# Altium PCB EtherIOv3.PcbDoc (part 1 of 2)
Units mil, origin at the board's own origin, x right, y up, seen from the top; angles counter-clockwise.
Board outline 4380 x 2505 mil, 2 copper layers (Top Layer, Bottom Layer); 104 components, 130 nets, 501 pads, 199 vias.
Unrouted connection lines stored in the file: 3.
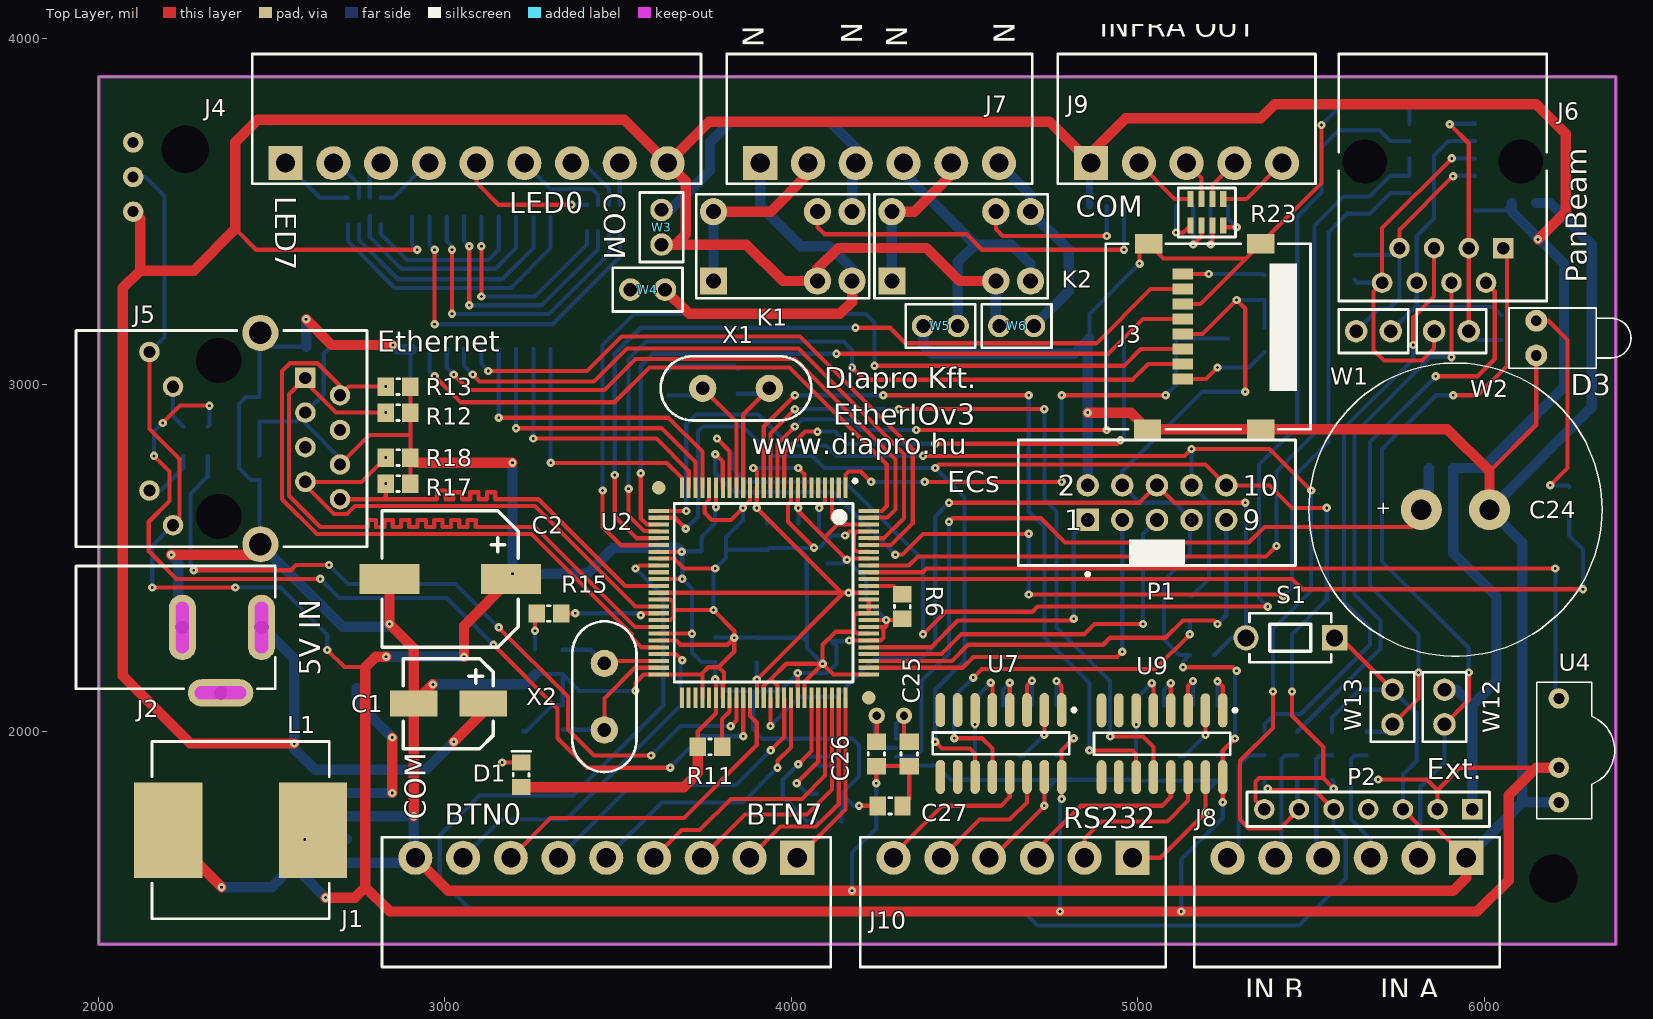
[diagram p0: Top Layer view]
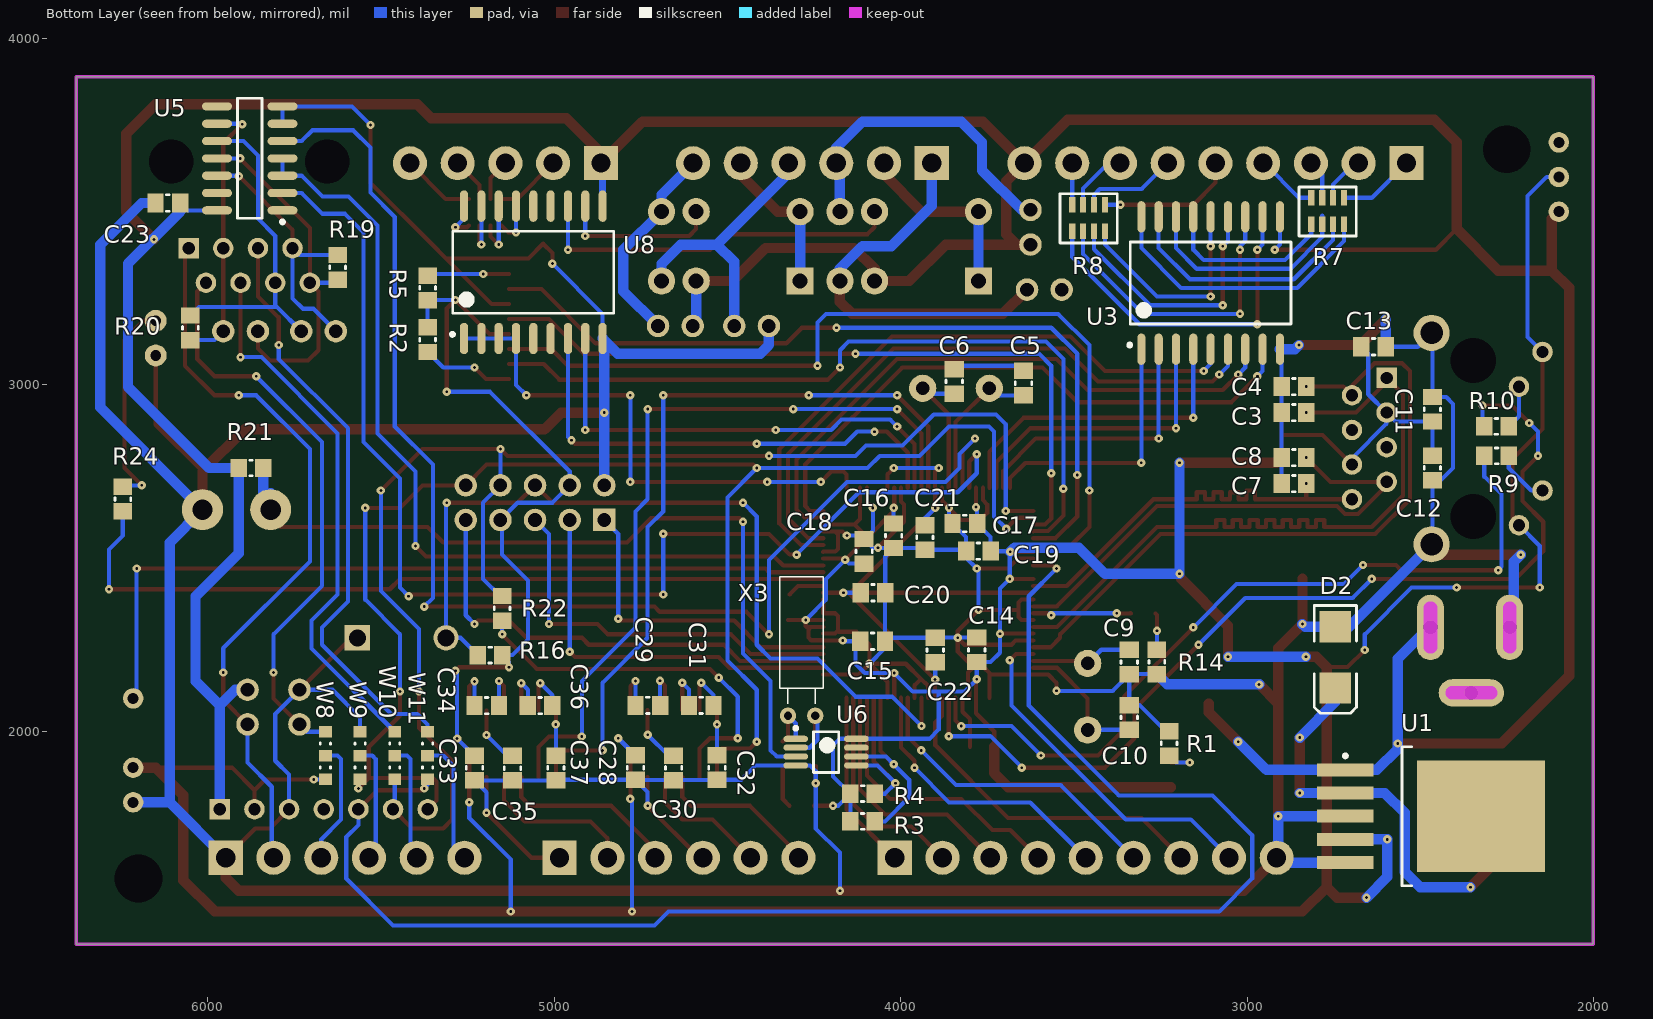
[diagram p1: Bottom Layer view, seen from below]

## Layer stack, top to bottom
Top Layer: signal copper 1.4
Dielectric: dielectric 12.6, FR-4, Dk 4.8
Bottom Layer: signal copper 1.4

## Board outline
2000,1385 6380,1385 6380,3890 2000,3890

## Design rules (kind name [scope] priority, off if disabled: settings)
Clearance [Not OnLayer('Keep-Out Layer') vs Not OnLayer('Keep-Out Layer')] p1: gap=7
HoleSize [All] p1: absolutevalues=TRUE maxlimit=140 minlimit=1 maxpercent=80.000 minpercent=20.000
MinimumSolderMaskSliver [All] p1: minsoldermaskwidth=1
PolygonConnect [All] p1: connectstyle=Relief reliefconductorwidth=10 reliefentries=4 polygonreliefangle="90 Angle"
RoutingVias [All] p1: holewidth=8 width=24 viastyle="Through Hole" minholewidth=8 minwidth=24 maxholewidth=8 maxwidth=24
SilkscreenOverComponentPads [All] p1: minsilkscreentomaskgap=0
SolderMaskExpansion [All] p1: expansion=4
Width Width_Power [(InNet('NetU1_5') OR InNet('NetU1_18'))] p1: maxlimit=50 minlimit=10 preferedwidth=25
Width [All] p2: maxlimit=30 minlimit=8 preferedwidth=12
25 further rules are at their usual default settings.

## Classes and differential pairs
component class EtherIOv3: C1 C2 C3 C4 C5 C6 C7 C8 C9 C10 C11 C12 C13 C14 C15 C16 C17 C18 C19 C20 C21 C22 D1 D2 D3 J1 J2 J3 J4 J5 L1 P1 R1 R2 R3 R4 R5 R6 R7 R8 R9 R10 R11 R12 R13 R14 R15 R16 R17 R18 R24 S1 U1 U2 U3 U4 X1 X2

## Components (designator, comment, footprint, x,y, rotation, side; value= is the part's Value field where it differs from the comment)
C1 "100uF_25V" "ELECTROLIT CAP F80" 3010,2080 r0 top
C2 "1000uF_6V3" "ELECTROLIT CAP J10" 3015,2440 r0 top
C3 "CAP" "0805 CAP" 2864.57,2920 r0 bottom
C4 "CAP" "0805 CAP" 2864.57,2995 r0 bottom
C5 "CAP" "0805 CAP" 3645,3005 r270 bottom
C6 "CAP" "0805 CAP" 3845,3010 r270 bottom
C7 "CAP" "0805 CAP" 2864.57,2715 r0 bottom
C8 "CAP" "0805 CAP" 2864.57,2790 r0 bottom
C9 "CAP" "0805 CAP" 3340,2200 r90 bottom
C10 "CAP" "0805 CAP" 3340,2040 r270 bottom
C11 "CAP" "0805 CAP" 2465,2929.57 r270 bottom
C12 "CAP" "0805 CAP" 2465,2760.43 r270 bottom
C13 "CAP" "0805 CAP" 2634.57,3110 r180 bottom
C14 "CAP" "0805 CAP" 3780,2235.43 r270 bottom
C15 "CAP" "0805 CAP" 4080.43,2260 r0 bottom
C16 "CAP" "0805 CAP" 4020,2564.57 r90 bottom
C17 "CAP" "0805 CAP" 3814.57,2600 r180 bottom
C18 "CAP" "0805 CAP" 4105,2519.57 r270 bottom
C19 "CAP" "0805 CAP" 3775.43,2520 r180 bottom
C20 "CAP" "0805 CAP" 4079.57,2400 r0 bottom
C21 "CAP" "0805 CAP" 3930,2559.57 r90 bottom
C22 "CAP" "0805 CAP" 3900,2234.57 r270 bottom
C23 "CAP" "0805 CAP" 6115,3525 r0 bottom
C24 "ELKO" Goldcap_1F 5916.57,2640 r180 top
C25 "CAP" "0805 CAP" 4340,1935 r90 top
C26 "CAP" "0805 CAP" 4245,1935 r90 top
C27 "CAP" "0805 CAP" 4285,1785 r0 top
C28 "CAP" "0805 CAP" 4765,1895.43 r270 bottom
C29 "CAP" "0805 CAP" 4729.57,2075 r0 bottom
C30 "CAP" "0805 CAP" 4655,1894.57 r270 bottom
C31 "CAP" "0805 CAP" 4575.43,2075 r180 bottom
C32 "CAP" "0805 CAP" 4530,1895.43 r270 bottom
C33 "CAP" "0805 CAP" 5230,1894.57 r270 bottom
C34 "CAP" "0805 CAP" 5194.57,2074.13 r0 bottom
C35 "CAP" "0805 CAP" 5120,1893.7 r270 bottom
C36 "CAP" "0805 CAP" 5040.43,2074.13 r180 bottom
C37 "CAP" "0805 CAP" 4995,1894.57 r270 bottom
D1 "PWR" "0805 LED" 3220,1874.57 r90 top
D2 "D Schottky" DSO-C2/X2.3 2745,2213.58 r270 bottom
D3 "STATUS" LED-1 6150,3135 r0 top
J1 "BUTTONS" "Euroblock 3.5pitch 9P" 4016.77,1634.96 r180 top
J2 "PWR2.5" KLD-0202 1935,2300 r0 top
J3 "MicroSD" microSD 5130,3016.69 r90 top
J4 "LEDS" "Euroblock 3.5pitch 9P" 2540,3640 r0 top
J5 "EthernetConnector" LU1T516-43 2025,2845 r90 top
J6 "RJ45-PanBeam" JACK1.27-2H8B 5880,3955 r180 top
J7 "Relays" "Euroblock 3.5pitch 6P" 3910,3640 r0 top
J8 "PB audio IN/Extension" "Euroblock 3.5pitch 6P" 5947.8,1635 r180 top
J9 "Infra OUT" "Euroblock 3.5pitch 5P" 4865,3640 r0 top
J10 "RS232" "Euroblock 3.5pitch 6P" 4983.98,1635 r180 top
K1 "REL0" RSY-12 3975,3300 r90 top
K2 "REL1" RSY-12 4490,3300 r90 top
L1 "100uH" INDP127127X85N 2410,1715 r0 top
P1 "Header 5X2" IDC2.54-V10D 5055,2660 r0 top
P2 "Extension" HDR1X7 5965,1775 r180 top
R1 "RES" "0805 RES" 3225,1965 r270 bottom
R2 "RES" "0805 RES" 5365,3130.43 r90 bottom
R3 "RES" "0805 RES" 4109.57,1740 r0 bottom
R4 "RES" "0805 RES" 4109.57,1820 r0 bottom
R5 "RES" "0805 RES" 5365,3280 r270 bottom
R6 "RES" "0805 RES" 4320,2360 r270 top
R7 "4x Res Array" "1206 4XRES ARRAY" 2720,3540 r0 bottom
R8 "4x Res Array" "1206 4XRES ARRAY" 3410,3520 r0 bottom
R9 "RES" "0805 RES" 2279.57,2795 r180 bottom
R10 "RES" "0805 RES" 2280,2880 r180 bottom
R11 "RES" "0805 RES" 3765,1955 r180 top
R12 "RES" "0805 RES" 2864.57,2920 r0 top
R13 "RES" "0805 RES" 2864.57,2995 r0 top
R14 "RES" "0805 RES" 3260,2200.43 r90 bottom
R15 "RES" "0805 RES" 3300,2340 r0 top
R16 "RES" "0805 RES" 5185,2220 r180 bottom
R17 "RES" "0805 RES" 2864.57,2715 r0 top
R18 "RES" "0805 RES" 2864.57,2790 r0 top
R19 "RES" "0805 RES" 5625,3339.33 r90 bottom
R20 "RES" "0805 RES" 6050,3164.76 r90 bottom
R21 "RES" "0805 RES" 5875,2760 r180 bottom
R22 "RES" "0805 RES" 5150,2355 r270 bottom
R23 "4x Res Array" "1206 4xRES ARRAY" 5246.5,3536.77 r180 top
R24 "RES" "0805 RES" 6245,2670.43 r270 bottom
S1 "SW-PB" SPST-2 5440,2270 r180 top
U1 "TS2576" TO-263-5L 2470,1755 r180 bottom
U2 "LM3S6911-IQC" QFP50P1600X1600X160-100N 3920,2400 r270 top
U3 "ULN2803A" SOIC127P1030X265-18N 3105,3294.06 r90 bottom
U4 "TSOP1736" TSOP17xx 6215,1945 r90 top
U5 "MAX491ESD" NSO14_N 5878.62,3653.82 r0 bottom
U6 "MCP79411" MSOP8 4215,1940 r180 bottom
U7 "MAX3232CSE" NSO16_M 4605,1965 r270 top
U8 "ULN2803A" SOIC127P1030X265-18N 5060,3325 r90 bottom
U9 "MAX3232CSE" NSO16_M 5070,1964.13 r270 top
W1 "Jumper" Jumper 5680,3154.76 r180 top
W2 "Jumper" Jumper 5905,3154.76 r180 top
W3 "Jumper" JUMPER 3625,3455 r270 top
W4 "Jumper" JUMPER 3585,3275 r180 top
W5 "Jumper" JUMPER 4430,3170 r180 top
W6 "Jumper" JUMPER 4650,3170 r180 top
W8 "A-/VCC3.3V" "0603 3WAY JUMPER" 5660,1964.45 r270 bottom
W9 "GND/AN0" "0603 3WAY JUMPER" 5560,1964.45 r270 bottom
W10 "B+/AN1" "0603 3WAY JUMPER" 5460,1964.45 r270 bottom
W11 "B-/GPIO4" "0603 3WAY JUMPER" 5365,1964.45 r270 bottom
W12 "Jumper" Jumper 5885,2070 r270 top
W13 "Jumper" Jumper 5735,2070 r270 top
X1 "CRYSTAL" CRYSTAL_LOW 3840,2990 r0 top
X2 "CRYSTAL" CRYSTAL_LOW 3460,2100 r270 top
X3 "CRYSTAL" CRYSTAL_MINI 4285.63,2045 r180 bottom

## Footprints (in the part's own frame and the unit in brackets; to place one, negate y for a bottom-side part, rotate by r counter-clockwise, add the part's x,y. Pads: shape width x height; smd on the part's side, far side on the other; paste and mask are expansions set on the pad)
"0603 3WAY JUMPER" [mm] "Chip Resistor, 2-Leads, Body 1,6x0,8mm, IPC Medium Density"
  rect 0.85x0.95 smd: 1(-0.875,0) 2(0.875,0) 3(2.625,0)
  silkscreen extent -0.05,-0.38 1.8,0.38, body extent -0.8,-0.45 2.5,0.45, height 0.55
"0805 CAP" [mm] "Chip Capacitor, 2-Leads, Body 2,0x1,3mm, IPC Medium Density"
  rect 1.2x1.4 smd: 1(-0.9,0) 2(0.9,0)
  silkscreen extent -0.1,-0.6 0.1,0.6, body extent -1.05,-0.67 1.05,0.67, height 1
"0805 LED" [mm] "SMD LED, 2-Leads, Body 2,0x1,3mm, IPC Medium Density"
  rect 1.2x1.35 smd: 1(-0.9,0) 2(0.9,0)
  silkscreen extent -0.1,-0.7 1.73,0.7, body extent -1.05,-0.67 1.05,0.67, height 1
"0805 RES" [mm] "Chip Resistor, 2-Leads, Body 2,0x1,3mm, IPC Medium Density"
  rect 1.2x1.35 smd: 1(-0.9,0) 2(0.9,0)
  silkscreen extent -0.1,-0.58 0.1,0.58, body extent -1.05,-0.67 1.05,0.67, height 1
"1206 4XRES ARRAY" [mm] "Chip Resistor, 2-Leads, Body 3,2x1,6mm, IPC Medium Density"
  rect 0.45x1.15 smd: 1(0,0) 2(0.8,0) 3(1.6,0) 4(2.4,0) 5(2.4,1.95) 6(1.6,1.95) 7(0.8,1.95) 8(0,1.95)
  silkscreen extent -0.9,-0.8 3.3,2.8, body extent -0.6,-0.3 3,2.3, height 0.6
"1206 4xRES ARRAY" [mm] "Chip Resistor, 2-Leads, Body 3,2x1,6mm, IPC Medium Density"
  rect 0.45x1.15 smd: 1(0,0) 2(0.8,0) 3(1.6,0) 4(2.4,0) 5(2.4,1.95) 6(1.6,1.95) 7(0.8,1.95) 8(0,1.95)
  silkscreen extent -0.9,-0.8 3.3,2.8, body extent -0.6,-0.3 3,2.3, height 0.6
CRYSTAL_LOW [mm]
  round 2 hole 1: 1(-2.44,0) 2(2.44,0)
  silkscreen extent -5.53,-2.35 5.53,2.35, body extent -5.6,-2.4 5.6,2.4, height 3.7
CRYSTAL_MINI [mm] "Furatszerelt D-3.1x8.2"
  round 1.2 hole 0.6: 1(-1,0) 2(1,0)
  silkscreen extent -1.6,0.89 1.6,10.2, body extent -1.5,2.1 1.49,10.1, height 3
DSO-C2/X2.3 [mm] "DO-214-AA/SMB; 2 C-Bend Leads; Body 5.3 x 3.6 mm, inc. leads (LxW)"
  rect 2.3x2.3 smd: 1(-2.25,0) 2(2.25,0)
  silkscreen extent -3.8,-1.55 4.1,1.55
"ELECTROLIT CAP F80" [mm]
  rect 3.5x1.9 smd: 1(-2.55,0) 2(2.55,0)
  silkscreen extent -3.3,-3.3 3.3,3.3, body extent -3.3,-3.3 3.3,3.3, height 7.6
"ELECTROLIT CAP J10" [mm]
  rect 4.4x2.2 smd: 1(-4.45,0) 2(4.45,0)
  silkscreen extent -5,-5 5,5, body extent -5,-5 5,5, height 10
"Euroblock 3.5pitch 5P" [mm] "3.5 mm pitch 5P connector"
  rect 2.5x2.5 hole 1.4: 1(0,0)
  round 2.5 hole 1.4 mask+0.102: 2(3.5,0) 3(7,0) 4(10.5,0) 5(14,0)
  silkscreen extent -2.45,-1.5 16.45,8, body extent -2.45,-1.5 16.45,8, height 7.2
"Euroblock 3.5pitch 6P" [mm] "3.5 mm pitch 6P connector"
  rect 2.5x2.5 hole 1.4: 1(0,0)
  round 2.5 hole 1.4 mask+0.102: 2(3.5,0) 3(7,0) 4(10.5,0) 5(14,0) 6(17.5,0)
  silkscreen extent -2.45,-1.5 19.95,8, body extent -2.45,-1.5 19.95,8, height 7.2
"Euroblock 3.5pitch 9P" [mm] "3.5 mm pitch 9P connector"
  rect 2.5x2.5 hole 1.4: 1(0,0)
  round 2.5 hole 1.4 mask+0.102: 2(3.5,0) 3(7,0) 4(10.5,0) 5(14,0) 6(17.5,0) 7(21,0) 8(24.5,0) 9(28,0)
  silkscreen extent -2.45,-1.5 30.45,8, body extent -2.45,-1.5 30.45,8, height 7.2
Goldcap_1F [mm] "Goldcap 1F 21.5x8mm"
  round 3 hole 1.5: 1(-2.5,0) 2(2.5,0)
  silkscreen extent -10.75,-10.75 10.75,10.75, body extent -10.72,-10.7 10.7,10.76, height 8
HDR1X7 [mm] "Connector; Header; 7 Position"
  rect 1.5x1.5 hole 0.9: 1(0,0)
  round 1.5 hole 0.9: 2(2.54,0) 3(5.08,0) 4(7.62,0) 5(10.16,0) 6(12.7,0) 7(15.24,0)
  silkscreen extent -1.27,-1.27 16.51,1.27
IDC2.54-V10D [mm] "Connector; IDC, Low Profile Male Header, Thru-Hole; 10 Position; Vertical; Pitch 2.54 mm; Body 20.32 x 9.2 x 9.45 mm (LxWxH)"
  rect 1.65x1.65 hole 1: 1(-5.08,-1.27)
  round 1.65 hole 1: 2(-5.08,1.27) 3(-2.54,-1.27) 4(-2.54,1.27) 5(0,-1.27) 6(0,1.27) 7(2.54,-1.27) 8(2.54,1.27) 9(5.08,-1.27) 10(5.08,1.27)
  silkscreen extent -10.16,-5.37 10.16,4.6, body extent -10.16,-4.6 10.16,4.6, height 9.45
INDP127127X85N [mm] "Precision Wire Wound Inductor, 2-Leads, Body 12,7x12,7mm, IPC Medium Density"
  rect 5x7 smd: 1(-5.3,0) 2(5.3,0)
  silkscreen extent -6.5,-6.5 6.5,6.5, body extent -6.5,-6.5 6.5,6.5, height 8.5
JACK1.27-2H8B [mm] "Connector; PCB Jack, Thru-Hole; 1-Port, 8 Positions, 8 Loaded; Unshielded without Lightpipes; Right Angle"
  rect 1.5x1.5 hole 0.9: 1(-4.445,14.23)
  round 1.5 hole 0.9: 2(-3.175,16.77) 3(-1.905,14.23) 4(-0.635,16.77) 5(0.635,14.23) 6(1.905,16.77) 7(3.175,14.23) 8(4.445,16.77)
  round 2.95 hole 3.25 unplated: MH1(-5.715,7.88) MH2(5.715,7.88)
  silkscreen extent -7.62,0 7.62,18.1, body extent -7.62,0 7.62,18.1, height 8.65
Jumper [mm] "Jumper, 2.54 pitch"
  round 1.65 hole 1: 1(-1.27,0) 2(1.27,0)
  silkscreen extent -2.55,-1.6 2.55,1.6, body extent -2.54,-1.6 2.54,1.6, height 8.54
JUMPER [mm] "Jumper, 2.54 pitch"
  round 1.65 hole 1: 1(-1.27,0) 2(1.27,0)
  silkscreen extent -2.55,-1.6 2.55,1.6, body extent -2.54,-1.6 2.54,1.6, height 8.54
KLD-0202 [mm] "DC Power Jack, 2.5mm, KLD Series, PCB Mount"
  oval 2x4.8 hole 1: 1(13.6,0) 2(7.8,0)
  oval 4.8x2 hole 1: 3(10.6,-4.8)
  Keep-Out Layer lines w1: 7.8,-1.4 7.8,1.4 ; 9.2,-4.8 12,-4.8 ; 13.6,-1.4 13.6,1.4
  silkscreen extent 0,-4.5 14.6,4.5, body extent 0,-4.5 14.6,4.5, height 10.7
LED-1 [mm] "Typical RED GaAs LED; 2 Leads"
  round 1.6 hole 0.8: 1(0,1.27) 2(0,-1.27)
  silkscreen extent -2,-2.2 6.95,2.2
LU1T516-43 [mm] "Connector; PCB Jack, Thru-Hole; 1-Port, 8 Positions, 8 Loaded; Shielded without Lightpipes; Right Angle"
  round 2.65 hole 1.651: MH1(7.747,-11.227) MH2(-7.747,-11.227)
  round 2.95 hole 3.302 unplated: MH3(5.715,-8.179) MH4(-5.715,-8.179)
  rect 1.5x1.5 hole 0.9: P1(4.445,-14.529)
  round 1.5 hole 0.9: P2(3.175,-17.069) P3(1.905,-14.529) P4(0.635,-17.069) P5(-0.635,-14.529) P6(-1.905,-17.069) P7(-3.175,-14.529) P8(-4.445,-17.069) P9(6.35,-3.099) P10(3.81,-4.826) P11(-3.81,-3.099) P12(-6.35,-4.826)
  silkscreen extent -7.92,-19.05 7.92,2.29, body extent -7.87,-19.05 7.87,2.29, height 12.09
microSD [mm]
  rect 0.8x1.5 smd: 1(0,0) 2(1.1,0) 3(2.2,0) 4(3.3,0) 5(4.4,0) 6(5.5,0) 7(6.6,0) 8(7.7,0)
  rect 1.45x2 smd: 9(-3.675,2.6) 10(9.925,2.5) 11(-3.675,-5.7) 12(9.925,-5.7)
  Top Overlay keep-out region: -0.888,-8.349 8.462,-8.349 8.462,-6.349 -0.888,-6.349
  silkscreen extent -3.67,-9.35 9.92,5.65
MSOP8 [mm] "MSOP, 8-Leads, Body 3,0x3,0mm (max), Pitch 0,65mm, IPC Medium Density"
  oval 1.8x0.45 smd: 1(-2.225,0.975) 2(-2.225,0.325) 3(-2.225,-0.325) 4(-2.225,-0.975) 5(2.225,-0.975) 6(2.225,-0.325) 7(2.225,0.325) 8(2.225,0.975)
  silkscreen extent -2.35,-1.5 0.92,1.87, body extent -1.52,-1.53 1.53,1.52, height 1.1
NSO14_N [mm] "SOIC, 14-Leads, Body 8.7x3.9mm, Pitch 1.27mm, IPC Medium Density"
  oval 2.2x0.6 smd: 1(-2.4,3.81) 2(-2.4,2.54) 3(-2.4,1.27) 4(-2.4,0) 5(-2.4,-1.27) 6(-2.4,-2.54) 7(-2.4,-3.81) 8(2.4,-3.81) 9(2.4,-2.54) 10(2.4,-1.27) 11(2.4,0) 12(2.4,1.27) 13(2.4,2.54) 14(2.4,3.81)
  silkscreen extent -2.52,-4.4 0.9,4.78, body extent -2,-4.38 2,4.38, height 1.75
NSO16_M [mm] "SOIC, 16-Leads, Body 9.9x3.9mm, Pitch 1.27mm, IPC Low Density"
  oval 2.5x0.7 smd: 1(-2.45,4.445) 2(-2.45,3.175) 3(-2.45,1.905) 4(-2.45,0.635) 5(-2.45,-0.635) 6(-2.45,-1.905) 7(-2.45,-3.175) 8(-2.45,-4.445) 9(2.45,-4.445) 10(2.45,-3.175) 11(2.45,-1.905) 12(2.45,-0.635) 13(2.45,0.635) 14(2.45,1.905) 15(2.45,3.175) 16(2.45,4.445)
  silkscreen extent -2.57,-5 0.8,5.47, body extent -2,-5 2,5, height 1.75
QFP50P1600X1600X160-100N [mm] "QFP,0.50mm pitch,square;25 pin X 25 pin,14.00mm X 14.00mm X 1.60mm H body"
  rect 1.5x0.3 smd: 1(-7.7,6) 2(-7.7,5.5) 3(-7.7,5) 4(-7.7,4.5) 5(-7.7,4) 6(-7.7,3.5) 7(-7.7,3) 8(-7.7,2.5) 9(-7.7,2) 10(-7.7,1.5) 11(-7.7,1) 12(-7.7,0.5) 13(-7.7,0) 14(-7.7,-0.5) 15(-7.7,-1) 16(-7.7,-1.5) 17(-7.7,-2) 18(-7.7,-2.5) 19(-7.7,-3) 20(-7.7,-3.5) 21(-7.7,-4) 22(-7.7,-4.5) 23(-7.7,-5) 24(-7.7,-5.5) 25(-7.7,-6) 51(7.7,-6) 52(7.7,-5.5) 53(7.7,-5) 54(7.7,-4.5) 55(7.7,-4) 56(7.7,-3.5) 57(7.7,-3) 58(7.7,-2.5) 59(7.7,-2) 60(7.7,-1.5) 61(7.7,-1) 62(7.7,-0.5) 63(7.7,0) 64(7.7,0.5) 65(7.7,1) 66(7.7,1.5) 67(7.7,2) 68(7.7,2.5) 69(7.7,3) 70(7.7,3.5) 71(7.7,4) 72(7.7,4.5) 73(7.7,5) 74(7.7,5.5) 75(7.7,6)
  rect 0.3x1.5 smd: 26(-6,-7.7) 27(-5.5,-7.7) 28(-5,-7.7) 29(-4.5,-7.7) 30(-4,-7.7) 31(-3.5,-7.7) 32(-3,-7.7) 33(-2.5,-7.7) 34(-2,-7.7) 35(-1.5,-7.7) 36(-1,-7.7) 37(-0.5,-7.7) 38(0,-7.7) 39(0.5,-7.7) 40(1,-7.7) 41(1.5,-7.7) 42(2,-7.7) 43(2.5,-7.7) 44(3,-7.7) 45(3.5,-7.7) 46(4,-7.7) 47(4.5,-7.7) 48(5,-7.7) 49(5.5,-7.7) 50(6,-7.7) 76(6,7.7) 77(5.5,7.7) 78(5,7.7) 79(4.5,7.7) 80(4,7.7) 81(3.5,7.7) 82(3,7.7) 83(2.5,7.7) 84(2,7.7) 85(1.5,7.7) 86(1,7.7) 87(0.5,7.7) 88(0,7.7) 89(-0.5,7.7) 90(-1,7.7) 91(-1.5,7.7) 92(-2,7.7) 93(-2.5,7.7) 94(-3,7.7) 95(-3.5,7.7) 96(-4,7.7) 97(-4.5,7.7) 98(-5,7.7) 99(-5.5,7.7) 100(-6,7.7)
  round 1 smd: 101(-7.7,-7.7) 102(7.7,7.7)
  Top Layer pour cut-out: 154 vertices and 0 holes, not listed, extent 6.7,6.7 8.7,8.7
  Top Layer pour cut-out: 154 vertices and 0 holes, not listed, extent -8.7,-8.7 -6.7,-6.7
  silkscreen extent -8.32,-6.55 6.55,6.83
RSY-12 [mm]
  round 2 hole 1.1: COIL1(0,-2.54) COIL2(5.08,-2.54) COM2(5.08,5.08) NC(0,-5.08) NO(5.08,-5.08)
  rect 2x2 hole 1.1: COM1(0,5.08)
  silkscreen extent -1.27,-6.35 6.35,6.35, body extent -1.27,-6.35 6.35,6.35, height 10.2
SOIC127P1030X265-18N [mm] "SOIC, 18-Leads, Body 11,8x7,6mm (max), Pitch 1,27mm, IPC Medium Density"
  oval 2.3x0.6 smd: 1(-4.85,5.08) 2(-4.85,3.81) 3(-4.85,2.54) 4(-4.85,1.27) 5(-4.85,0) 6(-4.85,-1.27) 7(-4.85,-2.54) 8(-4.85,-3.81) 9(-4.85,-5.08) 10(4.85,-5.08) 11(4.85,-3.81) 12(4.85,-2.54) 13(4.85,-1.27) 14(4.85,0) 15(4.85,1.27) 16(4.85,2.54) 17(4.85,3.81) 18(4.85,5.08)
  silkscreen extent -4.67,-5.9 3,6.06, body extent -3.8,-5.87 3.8,5.87, height 2.65
SPST-2 [mm] "Circuit Breaker; 2 Leads"
  rect 1.85x1.85 hole 1.25: 1(-3.25,0)
  round 1.85 hole 1.25: 2(3.25,0)
  silkscreen extent -3,-1.8 3,1.8
TO-263-5L [mm] "D2-PAK, 6-Pads, Body 8,3x10,2mm (max), IPC Medium Density"
  rect 4.15x0.95 smd: 1(-6.25,3.4) 2(-6.25,1.7) 3(-6.25,0) 4(-6.25,-1.7) 5(-6.25,-3.4)
  rect 9.4x8.2 smd: 6(3.7,0)
  silkscreen extent -6.38,-5.1 -1.4,5.1, body extent -2.1,-5.1 6.18,5.1, height 4.57
TSOP17xx [mm] "TSOP17xx IR Receiver"
  round 1.5 hole 0.8: 1(-3.81,0) 2(-1.27,0) 3(3.81,0)
  silkscreen extent -5,-4.09 5,1.6, body extent -5,-4.1 5,1.6, height 13.3

## Part data
C1 C2: "SMD Electrolit Capacitor"
C3 C4 C5 C6 C7 C8 C9 C10 C11 C12 C13 C14 C15 C16 C17 C18 C19 C20 C21 C22 C23 C25 C26 C27 C28 C29 C30 C31 C32 C33 C34 C35 C36 C37: "Capacitor"
C24: "Electrolit Capacitor"
D1: library part LED2, "Typical RED, GREEN, YELLOW, AMBER GaAs LED"
D2: "Schottky Diode"
D3: library part LED1, "Typical RED GaAs LED"
J1 J4: library part "Euroblock 9P connector"
J2: "Low Voltage Power Supply Connector"
J6: "PanBeam - RS485 + 2xAudio"
J7 J8 J10: library part "Euroblock 6P connector"
J9: library part "Euroblock 5P connector"
K1 K2: library part Relay, "SPDT Relay"
L1: library part Inductor, "Inductor"
P1: "Header, 5-Pin, Dual row"
P2: library part "Header 7", "Header, 7-Pin"
R1 R2 R3 R4 R5 R6 R9 R10 R11 R12 R13 R14 R15 R16 R17 R18 R19 R20 R21 R22 R24: "Resistor"
R7 R8 R23: "Isolated Resistor Network"
S1: "Switch"
U1: "Step Down DC-DC Converter"
U2: library part LM3S6611-IQC, "Stellaris ARM Cortex-M3 Microcontroller"
U3 U8: "8xDarlington Driver"
U4: library part TSOP17xx, "IR Receiver, 3-Pin"
U5: "Low-Power, Slew-Rate-Limited RS-485/RS-422 Transceiver"
U6: "MCP79411 I2C RTCC + MAC"
U7 U9: "3.0V TO 5.5V, Low-Power, up to 1Mbps, True RS-232 Transceiver Using Four 0.1µF External Capacitor"
W1 W2 W3 W4 W5 W6 W12 W13: "Jumper Wire"
W8 W9 W10 W11: library part Jumper_3way, "Jumper Wire"
X1 X2 X3: "Crystal"

## Free pads (board coordinates)
  round 59.06 hole 31.5: 0(2100,3700) 1(2100,3600) 2(2100,3500)
  round 60 hole 137.8: 0(2250,3680) 0(6200,1575)

## Via types
v1: diameter 24, hole 8, Top Layer to Bottom Layer, 199 vias

## Nets (pads, with @x,y where several pads share a name; then routed paths per layer and width w, separated by ;. In a path a pad name is that pad's centre, name@x,y a point inside that pad or via, vN(x,y) a via of type N, cw(c..) or ccw(c..) an arc to the next point about the centre after c; other vN are vias at no path point)
A+: J6.1 J8.2 W12.2 | length 2146.9
  Top Layer w12: W12.2@5885,2020 5955,2090 v1(5955,2170) ; v1(5910,2970) 5980,2970 6065,3055 6065,3384.76 J6.1@6055,3394.76
  Bottom Layer w12: J8.2@5810,1635 5815,1640 5815,1840 5885,1910 W12.2@5885,2020 ; v1(5910,2970) 5860,2970 5705,2815 5705,2490 5955,2240 v1(5955,2170)
A-: J6.2 W8.1 W13.2 | length 1677.3
  Top Layer w12: W13.2@5735,2020 5810,2095 v1(5810,2170) ; v1(5860,3025) 5980,3025 6030,3075 6030,3269.76 J6.2@6005,3294.76
  Bottom Layer w12: W8.1@5660,1998.9 5713.9,1998.9 W13.2@5735,2020 ; v1(5810,2170) 5810,2280 5670,2420 5670,2835 v1(5860,3025)
A-/VCC3.3V: J8.3 W8.2 | length 357.8
  Bottom Layer w12: W8.2@5660,1930 5625,1930 5615,1920 5615,1745 5672.2,1687.8 J8.3@5672.2,1635
AN2: P2.4
B+: J6.4 W10.1 | length 1577.5
  Top Layer w12: v1(5905,3080) J6.4@5905,3294.76
  Bottom Layer w12: W10.1@5460,1998.9 5700,2238.9 5700,2320 5625,2395 5625,2860 5845,3080 v1(5905,3080)
B+/U0RX: J8.5 W10.2 | length 341.8
  Bottom Layer w12: J8.5@5396.61,1635 5415,1653.39 5415,1920 5425,1930 W10.2@5460,1930
B-: J6.5 W11.1 | length 1704.9
  Top Layer w12: v1(5795,3115) 5795,3195 5855,3255 J6.5@5855,3394.76
  Bottom Layer w12: W11.1@5365,1998.9 5365,2020 5395,2050 5470,2050 5670,2250 5670,2300 5595,2375 5595,2875 5795,3075 v1(5795,3115)
B-/GPIO4: J8.6 W11.2 | length 365.3
  Bottom Layer w12: J8.6@5258.82,1635 5290,1666.18 5290,1900 5320,1930 W11.2@5365,1930
BTN0: J1.8 U2.47 | length 1017.7
  Top Layer w12: U2.47@3616.85,2222.83 3667.17,2222.83 v1(3685,2205)
  Bottom Layer w12: J1.8@3052.2,1634.96 3162.24,1745 3350,1745 3680,2075 3680,2200 v1(3685,2205)
BTN1: J1.7 U2.61 | length 989.5
  Top Layer w12: J1.7@3190,1634.96 3305.04,1750 3690,1750 3900,1960 3900,2025 3880.63,2044.37 U2.61@3880.63,2096.85
BTN2: J1.6 U2.66 | length 908.7
  Top Layer w12: v1(3940,1945) 3979.06,1984.06 U2.66@3979.06,2096.85
  Bottom Layer w12: J1.6@3327.8,1634.96 3537.83,1845 3840,1845 v1(3940,1945)
BTN3: J1.5 U2.67 | length 820
  Top Layer w12: v1(3960,1895) 3960,1915 3998.74,1953.74 U2.67@3998.74,2096.85
  Bottom Layer w12: J1.5@3465.59,1634.96 3625.63,1795 3860,1795 v1(3960,1895)
BTN4: J1.4 U2.72 | length 816.7
  Top Layer w12: J1.4@3603.39,1634.96 3683.42,1715 3735,1715 3825,1805 4030,1805 4097.17,1872.17 U2.72@4097.17,2096.85
BTN5: J1.3 U2.73 | length 722.2
  Top Layer w12: J1.3@3741.18,1634.96 3866.22,1760 4045,1760 4116.85,1831.85 U2.73@4116.85,2096.85
BTN6: J1.2 U2.74 | length 628.2
  Top Layer w12: J1.2@3878.98,1634.96 3969.02,1725 4070.87,1725 4136.54,1790.67 U2.74@4136.54,2096.85
BTN7: J1.1 U2.75 | length 519.7
  Top Layer w12: J1.1@4016.77,1634.96 4156.22,1774.41 U2.75@4156.22,2096.85
GND: C1.1 C2.1 C3.2 C4.2 C5.1 C6.1 C7.2 C8.2 C9.1 C10.1 C11.1 C12.2 C13.2 C14.1 C15.1 C16.1 C17.1 C18.1 C19.1 C20.1 C21.1 C22.1 C23.2 C24.1 C25.1 C26.1 C27.2 C28.2 C30.2 C32.2 C33.2 C35.2 C37.2 D2.1 D3.2 J1.9 J2.2 J3.6 J3.9 J3.10 J3.11 J3.12 J5.MH1 J5.MH2 J8.1 J10.1 J10.4 P1.2 P2.3 pad.0@2100,3700 R1.1 R14.1 S1.1 U1.3 U1.5 U2.4 U2.9 U2.15 U2.21 U2.33 U2.39 U2.42 U2.45 U2.50 U2.54 U2.57 U2.63 U2.65 U2.69 U2.76 U2.82 U2.85 U2.86 U2.87 U2.94 U2.97 U3.9 U4.1 U5.6 U5.7 U6.4 U7.15 U8.9 U9.15 W4.2 W5.2 W9.1 W13.1 | length 22899.8
  Top Layer w12: v1(3550,2116.85) 3550,2140 3573.78,2163.78 U2.50@3616.85,2163.78 3738.78,2163.78 3742.83,2167.83 ; U2.45@3616.85,2262.2 3667.8,2262.2 3680,2250 3815,2250 v1(3835,2270) ; U2.42@3616.85,2321.26 3650.98,2321.26 3659.38,2329.65 3659.38,2350 ; U2.39@3616.85,2380.32 3650.98,2380.32 3659.38,2371.92 3659.38,2350 ; U2.33@3616.85,2498.43 3661.57,2498.43 3690,2470 v1(3780,2470) ; U2.54@3742.83,2096.85 3742.83,2167.83 ; U2.21@3762.52,2703.15 3762.52,2667.52 3750,2655 3750,2630 3770,2610 3825,2610 v1(3860,2645) 3880.63,2665.63 U2.15@3880.63,2703.15 ; U2.57@3801.89,2096.85 3801.89,2136.53 3805,2139.64 3805,2170 3790,2185 ; U2.63@3920,2096.85 3920,2130.98 3928.39,2139.38 3929.38,2139.38 3941.12,2151.12 ; U2.65@3959.37,2096.85 3959.37,2132.86 3941.12,2151.12 ; U2.9@3998.74,2703.15 3998.74,2663.74 3990,2655 3990,2605 v1(4065,2530) ; U2.69@4038.11,2096.85 4038.11,2143.11 v1(4090,2195) ; v1(4080,2645) 4097.17,2662.17 U2.4@4097.17,2703.15 ; v1(4155,2565) 4167.17,2577.17 4189.02,2577.17 ; 4177.56,2287.2 4127.2,2287.2 4090,2250 v1(4090,2195) ; U2.76@4223.15,2163.78 4121.22,2163.78 v1(4090,2195) ; U2.82@4223.15,2281.89 4189.02,2281.89 4180.62,2290.28 4180.62,2332.55 4189.02,2340.94 U2.85@4223.15,2340.94 U2.86@4223.15,2360.63 U2.87@4223.15,2380.32 ; U2.94@4223.15,2518.11 4222.46,2518.8 4188.33,2518.8 4180.62,2526.51 4180.62,2568.77 4189.02,2577.17 ; U2.97@4223.15,2577.17 4189.02,2577.17 ; v1(4245,1850) C26.1@4245,1899.57 C25.1@4340,1899.57 4340,1804.57 C27.2@4320.43,1785 ; J10.4@4570.59,1635 4580,1635 v1(4730,1785) U7.15@4730,1868.54 ; J10.1@4983.98,1635 5065,1635 v1(5195,1765) U9.15@5195,1867.68 ; v1(5005,3350) 5005,3380.87 J3.10@5031.57,3407.44 5074.02,3365 5311.97,3365 ; J3.6@5130,3233.23 5180.2,3233.23 5311.97,3365 ; v1(5530,3750) 5530,3583.03 J3.12@5354.41,3407.44 5311.97,3365 ; S1.1@5567.95,2270 5585,2270 W13.1@5735,2120 ; P2.3@5765,1775 5820,1720 5862.8,1720 J8.1@5947.8,1635 ; 6015,2750 6150,2885 D3.2@6150,3085 ; 3659.38,2350 v1(3775,2350) 3835,2290 v1(3835,2270) ; 3742.83,2167.83 3760,2185 3790,2185 ; 3790,2185 3835,2230 v1(3835,2270) ; 3941.12,2151.12 3985,2195 v1(4090,2195)
  Top Layer w30: v1(2210,2510) 2437,2510 J5.MH2@2467,2540 J5.MH2@2467,2536.72 ; v1(2599.13,3189.13) 2673.27,3115 v1(2850,3115) ; C2.1@2839.8,2440 2839.8,2309.8 v1(2840,2309.61) 2909.61,2240 C1.1@2909.61,2080 ; v1(2910,1755) 2909.61,1755.39 C1.1@2909.61,2080 ; J1.9@2914.41,1634.96 3009.37,1540 v1(4175,1540) 5910,1540 5947.8,1577.8 J8.1@5947.8,1635 ; v1(2965,2135.39) C1.1@2909.61,2080 ; v1(4855,2920) 4979.65,2920 J3.9@5027.64,2872.01 J3.11@5354.41,2872.01 5892.99,2872.01 6015,2750 C24.1@6015,2640
  Bottom Layer w12: J5.MH2@2467,2540 2465,2542 C12.2@2465,2725 2440,2725 2405,2760 2405,2945 2425,2965 C11.1@2465,2965 2465,3148 J5.MH1@2467,3150 2507,3110 C13.2@2599.13,3110 ; C7.2@2900,2715 C8.2@2900,2790 C3.2@2900,2920 C4.2@2900,2995 2900,3098.11 U3.9@2905,3103.11 ; R1.1@3225,2000.43 3235.43,2000.43 3310.43,2075.43 C10.1@3340,2075.43 C9.1@3340,2164.57 ; R14.1@3260,2165 3339.57,2165 C9.1@3340,2164.57 ; v1(3550,2116.85) 3387.72,2116.85 C9.1@3340,2164.57 ; C5.1@3645,3040.43 3659.57,3055 3835.43,3055 C6.1@3845,3045.43 ; v1(3775,2350) 3775,2465 v1(3780,2470) 3810.87,2500.87 C19.1@3810.87,2520 ; C14.1@3780,2270.87 3899.13,2270.87 C22.1@3900,2270 4035,2270 C15.1@4045,2260 ; v1(3860,2645) 3860,2610 C17.1@3850,2600 3810.87,2560.87 C19.1@3810.87,2520 ; v1(4080,2645) 4080,2580 C18.1@4105,2555 ; v1(4090,2195) 4045,2240 C15.1@4045,2260 ; v1(4155,2565) 4115,2565 C18.1@4105,2555 ; v1(4175,1540) 4175,1650 4245,1720 v1(4245,1850) 4245,1885 4261.61,1901.61 U6.4@4302.6,1901.61 4418.39,1901.61 4460,1860 C32.2@4530,1860 4530.87,1859.13 C30.2@4655,1859.13 C28.2@4764.13,1859.13 ; v1(4730,1785) 4730,1825 C28.2@4764.13,1859.13 ; U8.9@4860,3134.06 4860,3205 v1(5005,3350) ; C37.2@4995,1859.13 4995.87,1858.27 C35.2@5120,1858.27 C33.2@5229.13,1858.27 ; C37.2@4995.87,1860 C28.2@4765,1860 C28.2@4764.13,1859.13 ; v1(5195,1765) 5195,1824.13 C33.2@5229.13,1858.27 ; C33.2@5230,1859.13 C33.2@5229.13,1858.27 ; v1(5530,3750) 5583.82,3803.82 U5.7@5784.13,3803.82 U5.6@5784.13,3753.82 ; W9.1@5560,1998.9 5560,2040 5640,2120 W13.1@5735,2120 5805,2050 5805,1915 5765,1875 P2.3@5765,1775 ; C19.1@3810.87,2520 3815,2524.13 C21.1@3930,2524.13 3935,2529.13 C16.1@4020,2529.13 ; C16.1@4020,2529.13 4079.13,2529.13 C18.1@4105,2555 ; C16.1@4020,2529.13 4044.13,2505 C20.1@4044.13,2400 4045,2399.13 C15.1@4045,2260
  Bottom Layer w30: v1(2210,2510) 2230.28,2489.72 J2.2@2230.28,2300 ; J5.MH2@2467,2540 2704.83,2302.17 D2.1@2745,2302.17 2832.56,2302.17 v1(2840,2309.61) ; C13.2@2599.13,3110 v1(2599.13,3189.13) ; U1.5@2716.06,1621.14 2910,1621.14 v1(2910,1755) ; U1.3@2716.06,1755 v1(2910,1755) ; 2850,1755 v1(2910,1755) ; v1(2850,3115) 2861.89,3103.11 U3.9@2905,3103.11 ; v1(2965,2135.39) 3230.39,2135.39 R14.1@3260,2165 ; W5.2@4380,3170 4380,3115 4405,3090 4815.94,3090 U8.9@4855,3129.06 ; P1.2@4855,2710 v1(4855,2920) U8.9@4855,3129.06 ; U8.9@4860,3134.06 U8.9@4855,3129.06 ; J8.1@5947.8,1635 5950,1635 6110,1795 ; C23.2@6150.43,3525 6190,3525 6310,3405 6310,2935 C24.1@6015,2640 6110,2545 6110,1795 ; U4.1@6215,1795 6110,1795
GND/U0TX: J8.4 W9.2 | length 342.2
  Bottom Layer w12: J8.4@5534.41,1635 5515,1654.41 5515,1920 5525,1930 W9.2@5560,1930
GPIO4: P2.5 U2.34 W11.3 | length 4610.4
  Top Layer w12: v1(3550,2470) 3552.52,2470 3561.26,2478.74 U2.34@3616.85,2478.74 ; v1(5375,1835) 5380,1830 5510,1830 P2.5@5565,1775
  Bottom Layer w12: v1(3550,2470) 3630,2390 3630,2075 3370,1815 3100,1815 2985,1700 2985,1575 3080,1480 4670,1480 4710,1440 5465,1440 5600,1575 5600,1695 5565,1730 P2.5@5565,1775 ; W11.3@5365,1861.1 5365,1845 v1(5375,1835)
"INFRA IN": U2.91 U4.3 | length 2361.4
  Top Layer w12: U2.91@4223.15,2459.06 4379.06,2459.06 4390,2470 v1(6205,2470)
  Bottom Layer w12: U4.3@6205,2095 v1(6205,2470)
"INFRA OUT": U2.1 U8.1 U8.2 U8.3 U8.4 | length 1554.4
  Top Layer w12: U2.1@4156.22,2703.15 4156.22,2741.22 4165,2750 4200,2750 v1(4230,2720) ; v1(4385,2720) v1(4780,2720) ; v1(4780,2970) v1(5080,2970)
  Bottom Layer w12: v1(4230,2720) v1(4385,2720) ; v1(4780,2720) v1(4780,2970) ; v1(5080,2970) 5110,3000 U8.4@5110,3134.06 U8.3@5160,3134.06 U8.2@5210,3134.06 U8.1@5260,3134.06
"INFRA OUT0": R23.5 U8.15 | length 126.2
  Top Layer w12: v1(5110,3440) 5132.01,3440 R23.5@5152.01,3460
  Bottom Layer w12: v1(5110,3440) U8.15@5110,3515.94
"INFRA OUT1": R23.6 U8.16 | length 175.7
  Top Layer w12: v1(5160,3405) 5183.5,3428.5 R23.6@5183.5,3460
  Bottom Layer w12: v1(5160,3405) U8.16@5160,3515.94
"INFRA OUT2": R23.7 U8.17 | length 168
  Top Layer w12: v1(5210,3405) 5215,3410 R23.7@5215,3460
  Bottom Layer w12: v1(5210,3405) U8.17@5210,3515.94
"INFRA OUT3": R23.8 U8.18 | length 111.9
  Top Layer w12: R23.8@5246.5,3460 5251.5,3455 v1(5285,3455)
  Bottom Layer w12: U8.18@5260,3515.94 5260,3480 v1(5285,3455)
LED0: U2.25 U3.1 | length 753.1
  Top Layer w12: v1(3305,2775) 3640,2775 3683.78,2731.22 U2.25@3683.78,2703.15
  Bottom Layer w12: v1(3305,2775) U3.1@3305,3103.11
LED1: U2.24 U3.2 | length 793.7
  Top Layer w12: v1(3255,2845) 3610,2845 3703.46,2751.54 U2.24@3703.46,2703.15
  Bottom Layer w12: v1(3255,2845) U3.2@3255,3103.11
LED2: U2.23 U3.3 | length 860.6
  Top Layer w12: v1(3205,2875) 3625,2875 3723.15,2776.85 U2.23@3723.15,2703.15
  Bottom Layer w12: v1(3205,2875) U3.3@3205,3103.11
LED3: U2.22 U3.4 | length 930.5
  Top Layer w12: v1(3155,2905) 3645,2905 3742.83,2807.17 U2.22@3742.83,2703.15
  Bottom Layer w12: v1(3155,2905) U3.4@3155,3103.11
LED4: U2.95 U3.5 | length 1840.1
  Top Layer w12: v1(3125,3040) 3410,3040 3510,3140 4025,3140 4350,2815 4350,2600 4287.8,2537.8 U2.95@4223.15,2537.8
  Bottom Layer w12: U3.5@3105,3103.11 3105,3060 v1(3125,3040)
LED5: U2.96 U3.6 | length 1813.1
  Top Layer w12: v1(3080,3030) 3100,3010 3430,3010 3525,3105 4020,3105 4325,2800 4325,2615 4267.48,2557.48 U2.96@4223.15,2557.48
  Bottom Layer w12: U3.6@3055,3103.11 3055,3055 v1(3080,3030)
LED6: U2.99 U3.7 | length 1764
  Top Layer w12: v1(3025,3030) 3070,2985 3460,2985 3550,3075 4010,3075 4300,2785 4300,2640 4277.22,2617.22 4223.83,2617.22 U2.99@4223.15,2616.54
  Bottom Layer w12: U3.7@3005,3103.11 3005,3050 v1(3025,3030)
LED7: U2.100 U3.8 | length 1755.3
  Top Layer w12: v1(2970,3025) 3045,2950 3490,2950 3590,3050 3995,3050 4275,2770 4275,2650 4261.22,2636.22 U2.100@4223.15,2636.22
  Bottom Layer w12: U3.8@2955,3103.11 2955,3040 v1(2970,3025)
MISO: J3.7 U2.30 | length 2377.3
  Top Layer w12: v1(3490,2740) 3490,2620 3552.52,2557.48 U2.30@3616.85,2557.48 ; v1(4185,3165) 4285,3165 4330,3120 4880,3120 5036.54,3276.54 J3.7@5130,3276.54
  Bottom Layer w12: v1(3490,2740) 3490,3090 3565,3165 v1(4185,3165)
MOSI: J3.3 U2.31 | length 2544.6
  Top Layer w12: v1(3455,2695) 3455,2590 3507.98,2537.02 3585,2537.02 ; v1(4240,3055) 4960,3055 5008.31,3103.31 J3.3@5130,3103.31
  Bottom Layer w12: v1(3455,2695) 3455,3115 3545,3205 4215,3205 4240,3180 v1(4240,3055)